# EAGLE board Scheffknecht_input_switch (EAGLE 7.7.0)
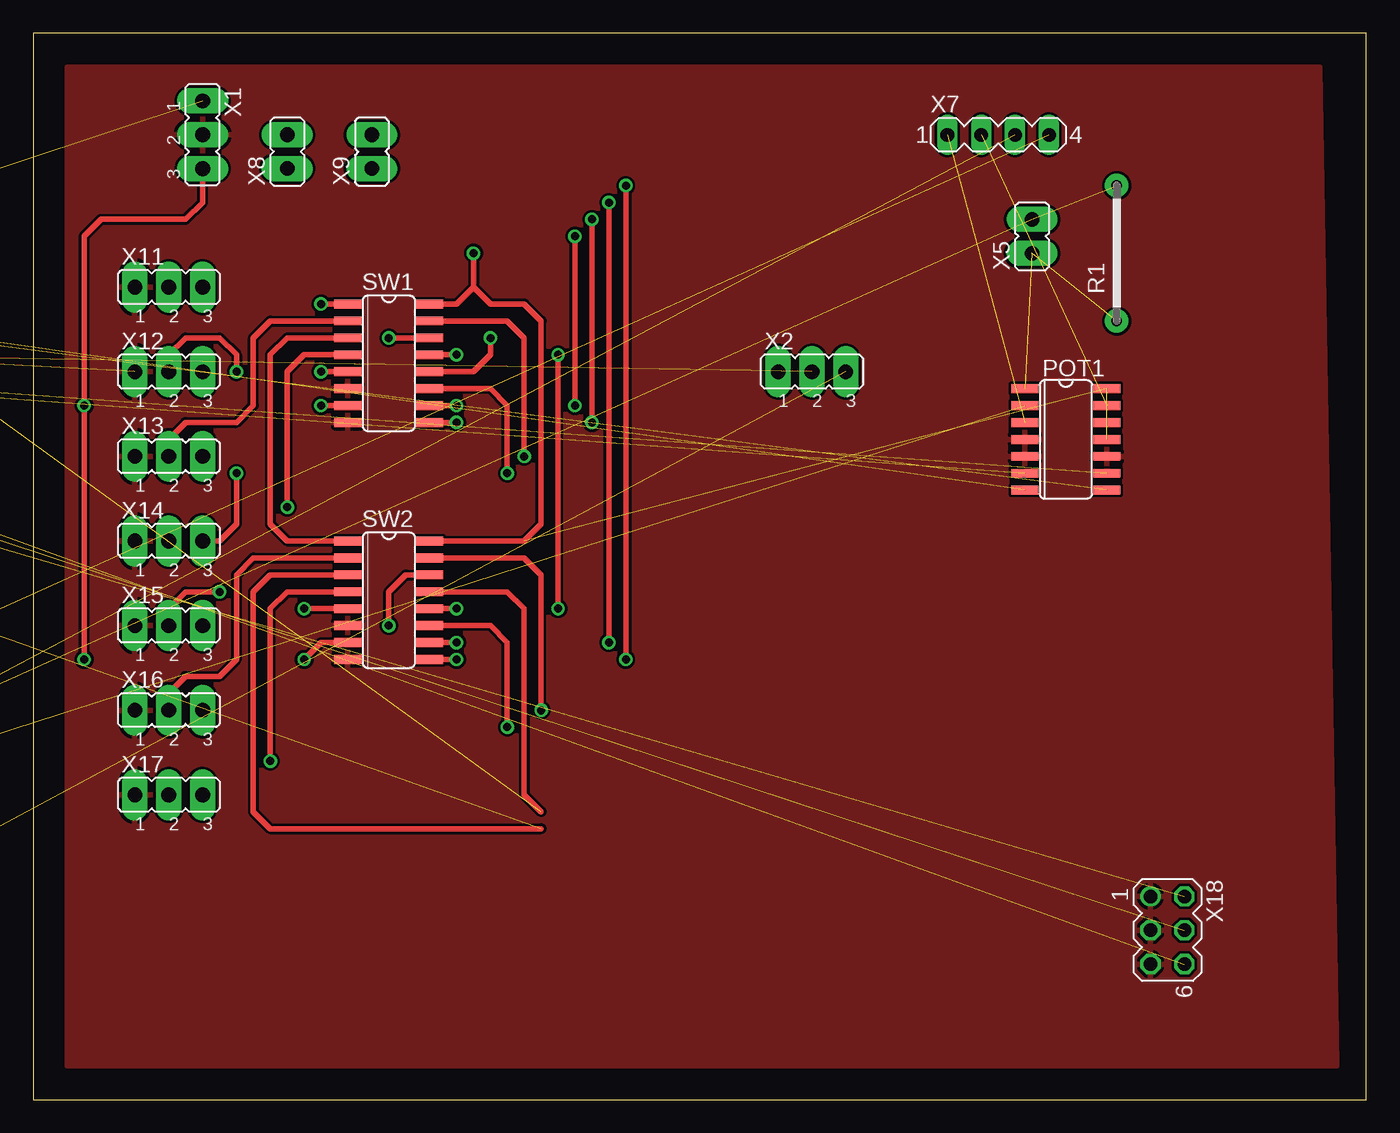
[diagram p0: board, top side]
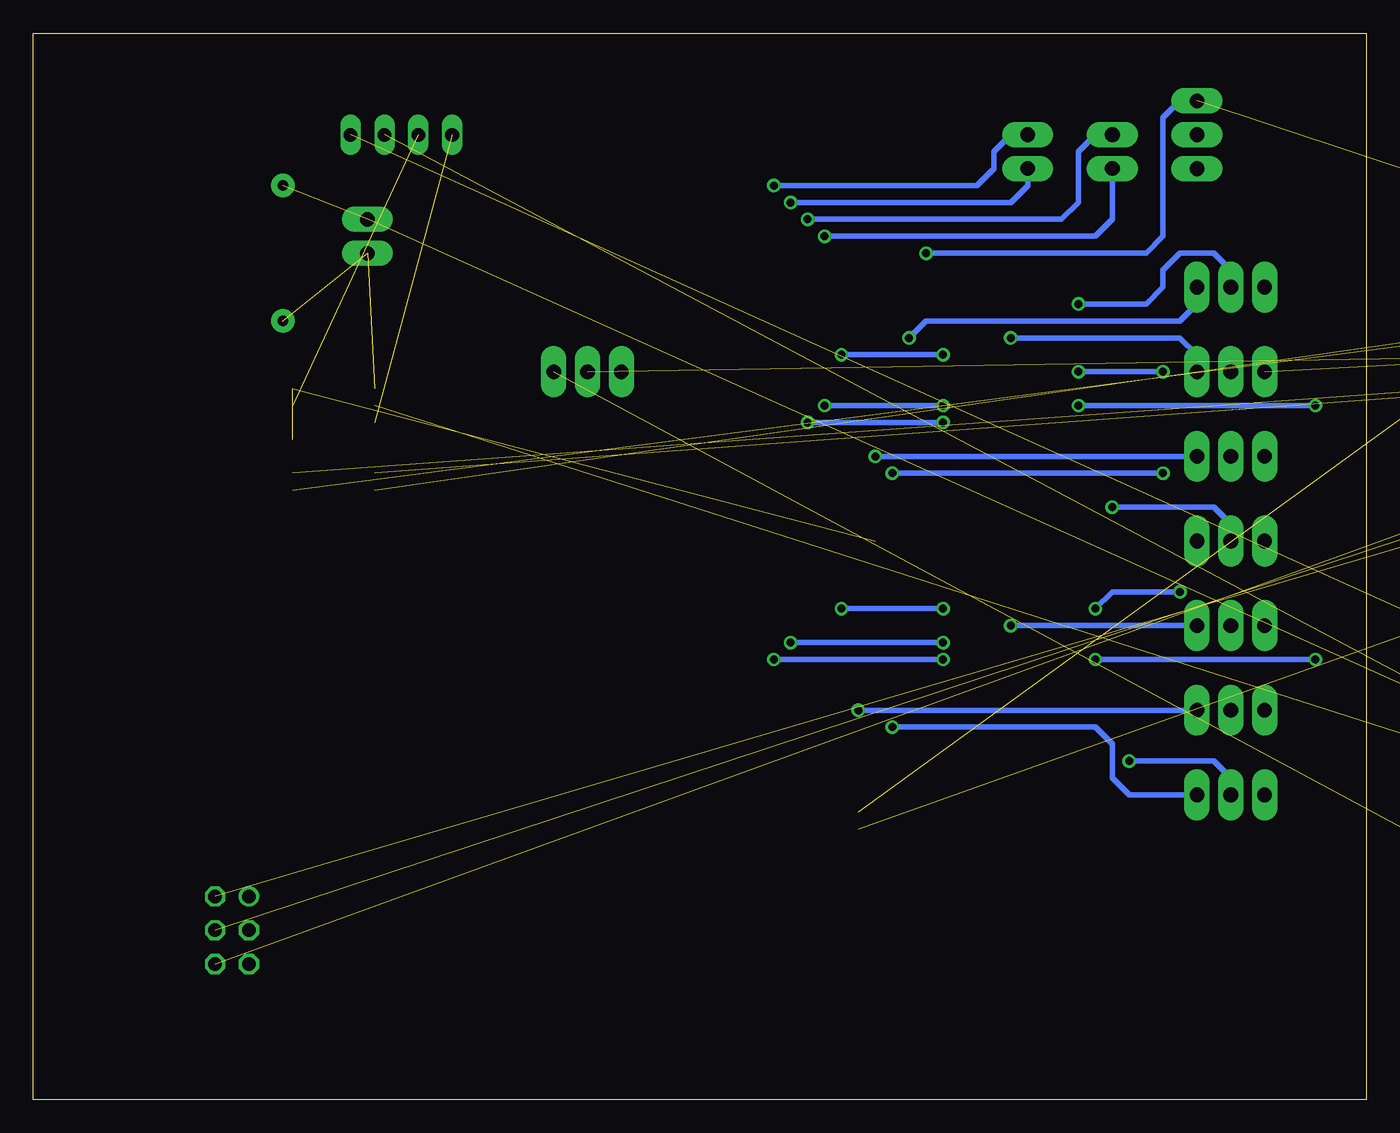
[diagram p1: board, bottom side, seen from below]

Size 100 x 80 mm. Coordinates in mm from the lower left corner, seen from the top.
Outline: 0,0 100,0 100,80 0,80 0,0
Copper layers (1*16): Top 0.035mm / dielectric 1.5mm / Bottom 0.035mm
Design rules "default": minimum track width 10mil, minimum drill 0.6mm, track to track 8mil, track to pad 8mil, pad to pad 8mil, via to via 8mil, smd to smd 8mil, copper to edge 40mil, drill to drill 8mil, minimum pad ring 10mil, minimum via ring 8mil, stop-mask expansion 4mil, vias tented up to drill 0mil, thermal gap 10mil

## Footprints (pad centres in the part's own frame; a part is rotated, then mirrored left to right if it is on the bottom)
C0805 = smd 1.3 x 1.5: 1 -0.95,0; 2 0.95,0
SO14 = smd 0.66 x 2.032: 1 -3.81,-3.073; 2 -2.54,-3.073; 3 -1.27,-3.073; 4 0,-3.073; 5 1.27,-3.073; 6 2.54,-3.073; 7 3.81,-3.073; 8 3.81,3.073; 9 2.54,3.073; 10 1.27,3.073; 11 0,3.073; 12 -1.27,3.073; 13 -2.54,3.073; 14 -3.81,3.073
R0/10 = drill 0.8 pad 1.778: 1 -5.08,0; 2 5.08,0
M0805 = smd 1.3 x 1.6: 1 -0.95,0; 2 0.95,0
SO-16 = smd 0.66 x 2.032: 1 -4.445,-3.073; 2 -3.175,-3.073; 3 -1.905,-3.073; 4 -0.635,-3.073; 5 0.635,-3.073; 6 1.905,-3.073; 7 3.175,-3.073; 8 4.445,-3.073; 9 4.445,3.073; 10 3.175,3.073; 11 1.905,3.073; 12 0.635,3.073; 13 -0.635,3.073; 14 -1.905,3.073; 15 -3.175,3.073; 16 -4.445,3.073
JMP3 = drill 1.1 pad 1.93 long: 1 -2.54,0; 2 0,0; 3 2.54,0
JMP2 = drill 1.1 pad 1.93 long: 1 0,-1.27; 2 0,1.27
PIN1 = drill 1 pad 1.778 square: P$2 -1.27,0
MA04-1 = drill 1.016 long: 1 -3.81,0; 2 -1.27,0; 3 1.27,0; 4 3.81,0
MA03-2 = drill 1.016: 1 -2.54,-1.27 | drill 1.016 octagon: 2 -2.54,1.27; 3 0,-1.27; 4 0,1.27; 5 2.54,-1.27; 6 2.54,1.27

## Placement (x,y rotation side)
C1  [C0805]  -40.64,55.88 0 top  (outside the outline)
C2  [C0805]  -45.72,55.88 0 top  (outside the outline)
C3  [C0805]  -50.8,55.88 0 top  (outside the outline)
C4  [C0805]  -55.88,55.88 0 top  (outside the outline)
FRAME1  HTL-A3-H  [HTL-LEER]  -62.23,60.96 0 top  (outside the outline)
POT1  MCP42010_SO14  [SO14]  77.47,49.53 270 top
POT2  MCP42010_SO14  [SO14]  -24.13,22.86 0 top  (outside the outline)
R1  [R0/10]  81.28,63.5 90 top
R2  [M0805]  -60.96,55.88 0 top  (outside the outline)
R3  [M0805]  -15.24,60.96 0 top  (outside the outline)
R4  [M0805]  -20.32,60.96 0 top  (outside the outline)
R5  [M0805]  -25.4,60.96 0 top  (outside the outline)
R6  [M0805]  -30.48,60.96 0 top  (outside the outline)
R7  [M0805]  -35.56,60.96 0 top  (outside the outline)
R8  [M0805]  -40.64,60.96 0 top  (outside the outline)
R9  [M0805]  -45.72,60.96 0 top  (outside the outline)
R10  [M0805]  -49.53,46.99 0 top  (outside the outline)
R11  [M0805]  -54.61,46.99 0 top  (outside the outline)
R12  [M0805]  -59.69,46.99 0 top  (outside the outline)
R13  [M0805]  -15.24,55.88 0 top  (outside the outline)
R14  [M0805]  -20.32,55.88 0 top  (outside the outline)
R15  [M0805]  -25.4,55.88 0 top  (outside the outline)
R16  [M0805]  -30.48,55.88 0 top  (outside the outline)
R17  [M0805]  -35.56,55.88 0 top  (outside the outline)
R18  [M0805]  -60.96,-5.08 0 top  (outside the outline)
R19  [M0805]  -60.96,-11.43 0 top  (outside the outline)
SW1  4052  [SO-16]  26.67,55.24 270 top
SW2  4052  [SO-16]  26.67,37.47 270 top
X1  5V GND -5V  [JMP3]  12.7,72.39 270 top
X2  1 FR 0  [JMP3]  58.42,54.61 0 top
X3  1 FL 0  [JMP3]  -35.56,41.91 0 top  (outside the outline)
X4  1 FSub 0  [JMP3]  -17.78,41.91 0 top  (outside the outline)
X5  CS1 CS2  [JMP2]  74.93,64.77 0 top
X6  SCK  [PIN1]  -21.59,46.99 0 top  (outside the outline)
X7  SI1 S01 SI2 SO2  [MA04-1]  72.39,72.39 0 top
X8  1A0 1A1  [JMP2]  19.05,71.12 0 top
X9  2A0 2A1  [JMP2]  25.4,71.12 0 top
X10  Mic GND  [JMP2]  -43.18,40.64 0 top  (outside the outline)
X11  GND L R 1  [JMP3]  10.16,60.96 0 top
X12  GND L R 2  [JMP3]  10.16,54.61 0 top
X13  GND L R 3  [JMP3]  10.16,48.26 0 top
X14  GND L R 4  [JMP3]  10.16,41.91 0 top
X15  GND L R 5  [JMP3]  10.16,35.56 0 top
X16  GND L R 6  [JMP3]  10.16,29.21 0 top
X17  GND L R 7  [JMP3]  10.16,22.86 0 top
X18  R L Sub, GND x3  [MA03-2]  85.09,12.7 270 top

## Library data of the parts
C1-C4 R2-R19 = rcl
FRAME1 = 0_HTL_frame
POT1 POT2 SW1 SW2 = 0_Custom-Lib_Verstärker
R1 = 0_HTL_analog
X1-X5 X8-X17 = 0_HTL_elektro
X6 = 0_HTL_uC-MEGACARD
X7 X18 = con-lstb; OC_FARNELL: unknown; OC_NEWARK: unknown

## Nets
GND: POT1.4 POT1.5 POT1.10 POT2.4 POT2.5 POT2.10 R8.1 R9.1 R13.1 R17.1 SW1.6 SW1.8 SW2.6 SW2.8 X1.2 X10.2 X11.1 X12.1 X13.1 X14.1 X15.1 X16.1 X17.1 X18.1 X18.3 X18.5
N$1: POT2.1 R1.2 X5.2
N$2: POT1.1 R1.1 X5.1
N$3: SW1.3 SW2.1
N$4: SW1.13 SW2.12
N$5: SW1.9 X8.2
N$6: SW1.10 X8.1
N$7: SW2.9 X9.2
N$8: SW2.10 X9.1
N$9: POT1.8 R7.1 R9.2 R18.2
N$10: POT1.3 X7.1
N$11: SW1.7 SW2.7 X1.3
N$12: R3.1 SW2.13
N$13: R2.1 SW2.3
N$14: R3.2 R4.2 R10.1 R11.1 R14.1
N$15: R2.2 R5.2 R15.1
N$16: C4.1 R4.1 R5.1
N$17: R18.1 X3.3
N$18: C1.1 POT1.9
N$19: POT1.7 R6.1 R8.2 R19.2
N$20: R19.1 X2.3
N$21: C1.2 X18.6
N$22: R10.2 R11.2 R12.1 R13.2 X4.2
N$23: X4.1
N$24: POT2.8 X4.3
N$25: C3.2 POT2.9
N$26: C2.2 X18.4
N$27: C2.1 POT1.6
N$28: C3.1 X18.2
N$31: POT1.13 X7.2
N$32: POT2.3 X7.3
N$33: POT2.13 X7.4
N$34: C4.2 POT2.6
N$35: X10.1
N$36: POT2.7 R16.1 R17.2
N$37: POT1.2 POT2.2 X6.P$2
N$38: SW1.12 X11.3
N$39: SW1.1 X11.2
N$40: SW1.14 X12.3
N$41: SW1.5 X12.2
N$42: SW1.15 X13.3
N$43: SW1.2 X13.2
N$44: SW1.11 X14.3
N$45: SW1.4 X14.2
N$46: SW2.14 X15.3
N$47: SW2.5 X15.2
N$48: SW2.15 X16.3
N$49: SW2.2 X16.2
N$50: SW2.11 X17.3
N$51: SW2.4 X17.2
N$52: R15.2 X3.2
N$53: R14.2 X2.2
V+: POT1.11 POT1.12 POT1.14 POT2.11 POT2.12 POT2.14 R6.2 R7.2 R12.2 R16.2 SW1.16 SW2.16 X1.1

## Tracks (layer width: path | path; a pad name or v marks a point on that pad's centre or on a via)
GND  (8 unrouted)
  pour Top: 2.54,77.47 2.54,2.54 97.79,2.54 96.52,77.47
N$1  (2 unrouted)
N$2  (2 unrouted)
N$3
  Top 0.406: SW1.3 19.05,57.15 17.78,55.88 17.78,43.18 19.05,41.91 SW2.1
N$4  (via drill 0.6)
  Top 0.406: SW2.12 v31.75,36.83 | v39.37,36.83 v39.37,55.88 | v31.75,55.88 SW1.13
  Bottom 0.406: v31.75,36.83 v39.37,36.83 | v39.37,55.88 v31.75,55.88
N$5  (via drill 0.6)
  Top 0.406: v41.91,66.04 v41.91,50.8 | v31.75,50.8 SW1.9
  Bottom 0.406: X8.2 20.32,72.39 21.59,71.12 21.59,67.31 22.86,66.04 v41.91,66.04 | v41.91,50.8 v31.75,50.8
N$6  (via drill 0.6)
  Top 0.406: SW1.10 v31.75,52.07 | v40.64,52.07 v40.64,64.77
  Bottom 0.406: v31.75,52.07 v40.64,52.07 | v40.64,64.77 20.32,64.77 19.05,66.04 X8.1
N$7  (via drill 0.6)
  Top 0.406: v44.45,68.58 v44.45,33.02 | v31.75,33.02 SW2.9
  Bottom 0.406: X9.2 26.67,72.39 27.94,71.12 27.94,69.85 29.21,68.58 v44.45,68.58 | v44.45,33.02 v31.75,33.02
N$8  (via drill 0.6)
  Top 0.406: SW2.10 v31.75,34.29 | v43.18,34.29 v43.18,67.31
  Bottom 0.406: v31.75,34.29 v43.18,34.29 | v43.18,67.31 26.67,67.31 25.4,68.58 X9.1
N$9  (3 unrouted)
N$10  (1 unrouted)
N$11  (via drill 0.6)
  Top 0.406: SW1.7 v21.59,52.07 | X1.3 12.7,67.31 11.43,66.04 5.08,66.04 3.81,64.77 v3.81,52.07 v3.81,33.02 | v20.32,33.02 21.59,34.29 SW2.7
  Bottom 0.406: v21.59,52.07 v3.81,52.07 | v20.32,33.02 v3.81,33.02
N$12  (1 unrouted)
  Top 0.406: SW2.13 35.56,38.1 36.83,36.83 36.83,22.86 38.1,21.59
N$13  (1 unrouted)
  Top 0.406: SW2.3 17.78,39.37 16.51,38.1 16.51,21.59 17.78,20.32 38.1,20.32
N$14  (4 unrouted)
N$15  (2 unrouted)
N$16  (2 unrouted)
N$17  (1 unrouted)
N$18  (1 unrouted)
N$19  (3 unrouted)
N$20  (1 unrouted)
N$21  (1 unrouted)
N$22  (4 unrouted)
N$24  (1 unrouted)
N$25  (1 unrouted)
N$26  (1 unrouted)
N$27  (1 unrouted)
N$28  (1 unrouted)
N$31  (1 unrouted)
N$32  (1 unrouted)
N$33  (1 unrouted)
N$34  (1 unrouted)
N$36  (2 unrouted)
N$37  (2 unrouted)
N$38  (via drill 0.6)
  Top 0.406: v34.29,57.15 34.29,55.88 33.02,54.61 SW1.12
  Bottom 0.406: X11.3 12.7,59.69 13.97,58.42 33.02,58.42 v34.29,57.15
N$39  (via drill 0.6)
  Top 0.406: v21.59,59.69 SW1.1
  Bottom 0.406: X11.2 10.16,62.23 11.43,63.5 13.97,63.5 15.24,62.23 15.24,60.96 16.51,59.69 v21.59,59.69
N$40  (via drill 0.6)
  Top 0.406: v26.67,57.15 SW1.14
  Bottom 0.406: X12.3 12.7,55.88 13.97,57.15 v26.67,57.15
N$41  (via drill 0.6)
  Top 0.406: X12.2 10.16,55.88 11.43,57.15 13.97,57.15 15.24,55.88 v15.24,54.61 | v21.59,54.61 SW1.5
  Bottom 0.406: v15.24,54.61 v21.59,54.61
N$42  (via drill 0.6)
  Top 0.406: v36.83,48.26 36.83,57.15 35.56,58.42 SW1.15
  Bottom 0.406: X13.3 v36.83,48.26
N$43
  Top 0.406: X13.2 10.16,49.53 11.43,50.8 15.24,50.8 16.51,52.07 16.51,57.15 17.78,58.42 SW1.2
N$44  (via drill 0.6)
  Top 0.406: v35.56,46.99 35.56,52.07 34.29,53.34 SW1.11 | X14.3 13.97,41.91 15.24,43.18 v15.24,46.99
  Bottom 0.406: v15.24,46.99 v35.56,46.99
N$45  (via drill 0.6)
  Top 0.406: v19.05,44.45 19.05,54.61 20.32,55.88 SW1.4
  Bottom 0.406: v19.05,44.45 11.43,44.45 10.16,43.18 X14.2
N$46  (via drill 0.6)
  Top 0.406: v26.67,35.56 26.67,38.1 27.94,39.37 SW2.14
  Bottom 0.406: X15.3 v26.67,35.56
N$47  (via drill 0.6)
  Top 0.406: X15.2 10.16,36.83 11.43,38.1 v13.97,38.1 | v20.32,36.83 SW2.5
  Bottom 0.406: v13.97,38.1 19.05,38.1 v20.32,36.83
N$48  (via drill 0.6)
  Top 0.406: v38.1,29.21 38.1,39.37 36.83,40.64 SW2.15
  Bottom 0.406: X16.3 v38.1,29.21
N$49
  Top 0.406: X16.2 10.16,30.48 11.43,31.75 13.97,31.75 15.24,33.02 15.24,39.37 16.51,40.64 SW2.2
N$50  (via drill 0.6)
  Top 0.406: SW2.11 34.29,35.56 35.56,34.29 v35.56,27.94
  Bottom 0.406: X17.3 17.78,22.86 19.05,24.13 19.05,26.67 20.32,27.94 v35.56,27.94
N$51  (via drill 0.6)
  Top 0.406: v17.78,25.4 17.78,36.83 19.05,38.1 SW2.4
  Bottom 0.406: X17.2 10.16,24.13 11.43,25.4 v17.78,25.4
N$52  (1 unrouted)
N$53  (1 unrouted)
V+  (via drill 0.6)  (10 unrouted)
  Top 0.406: 33.02,60.96 31.75,59.69 SW1.16 | SW2.16 36.83,41.91 38.1,43.18 38.1,58.42 36.83,59.69 34.29,59.69 33.02,60.96 | v33.02,63.5 33.02,60.96
  Bottom 0.406: X1.1 13.97,74.93 15.24,73.66 15.24,64.77 16.51,63.5 v33.02,63.5